# Altium PCB pcb sensor.PcbDoc
Units mm, origin at the board's own origin, x right, y up, seen from the top; angles counter-clockwise.
Board outline 89.99 x 89.99 mm, 2 copper layers (Top Layer, Bottom Layer); 119 components, 66 nets, 291 pads, 24 vias.
Unrouted connection lines stored in the file: 17.
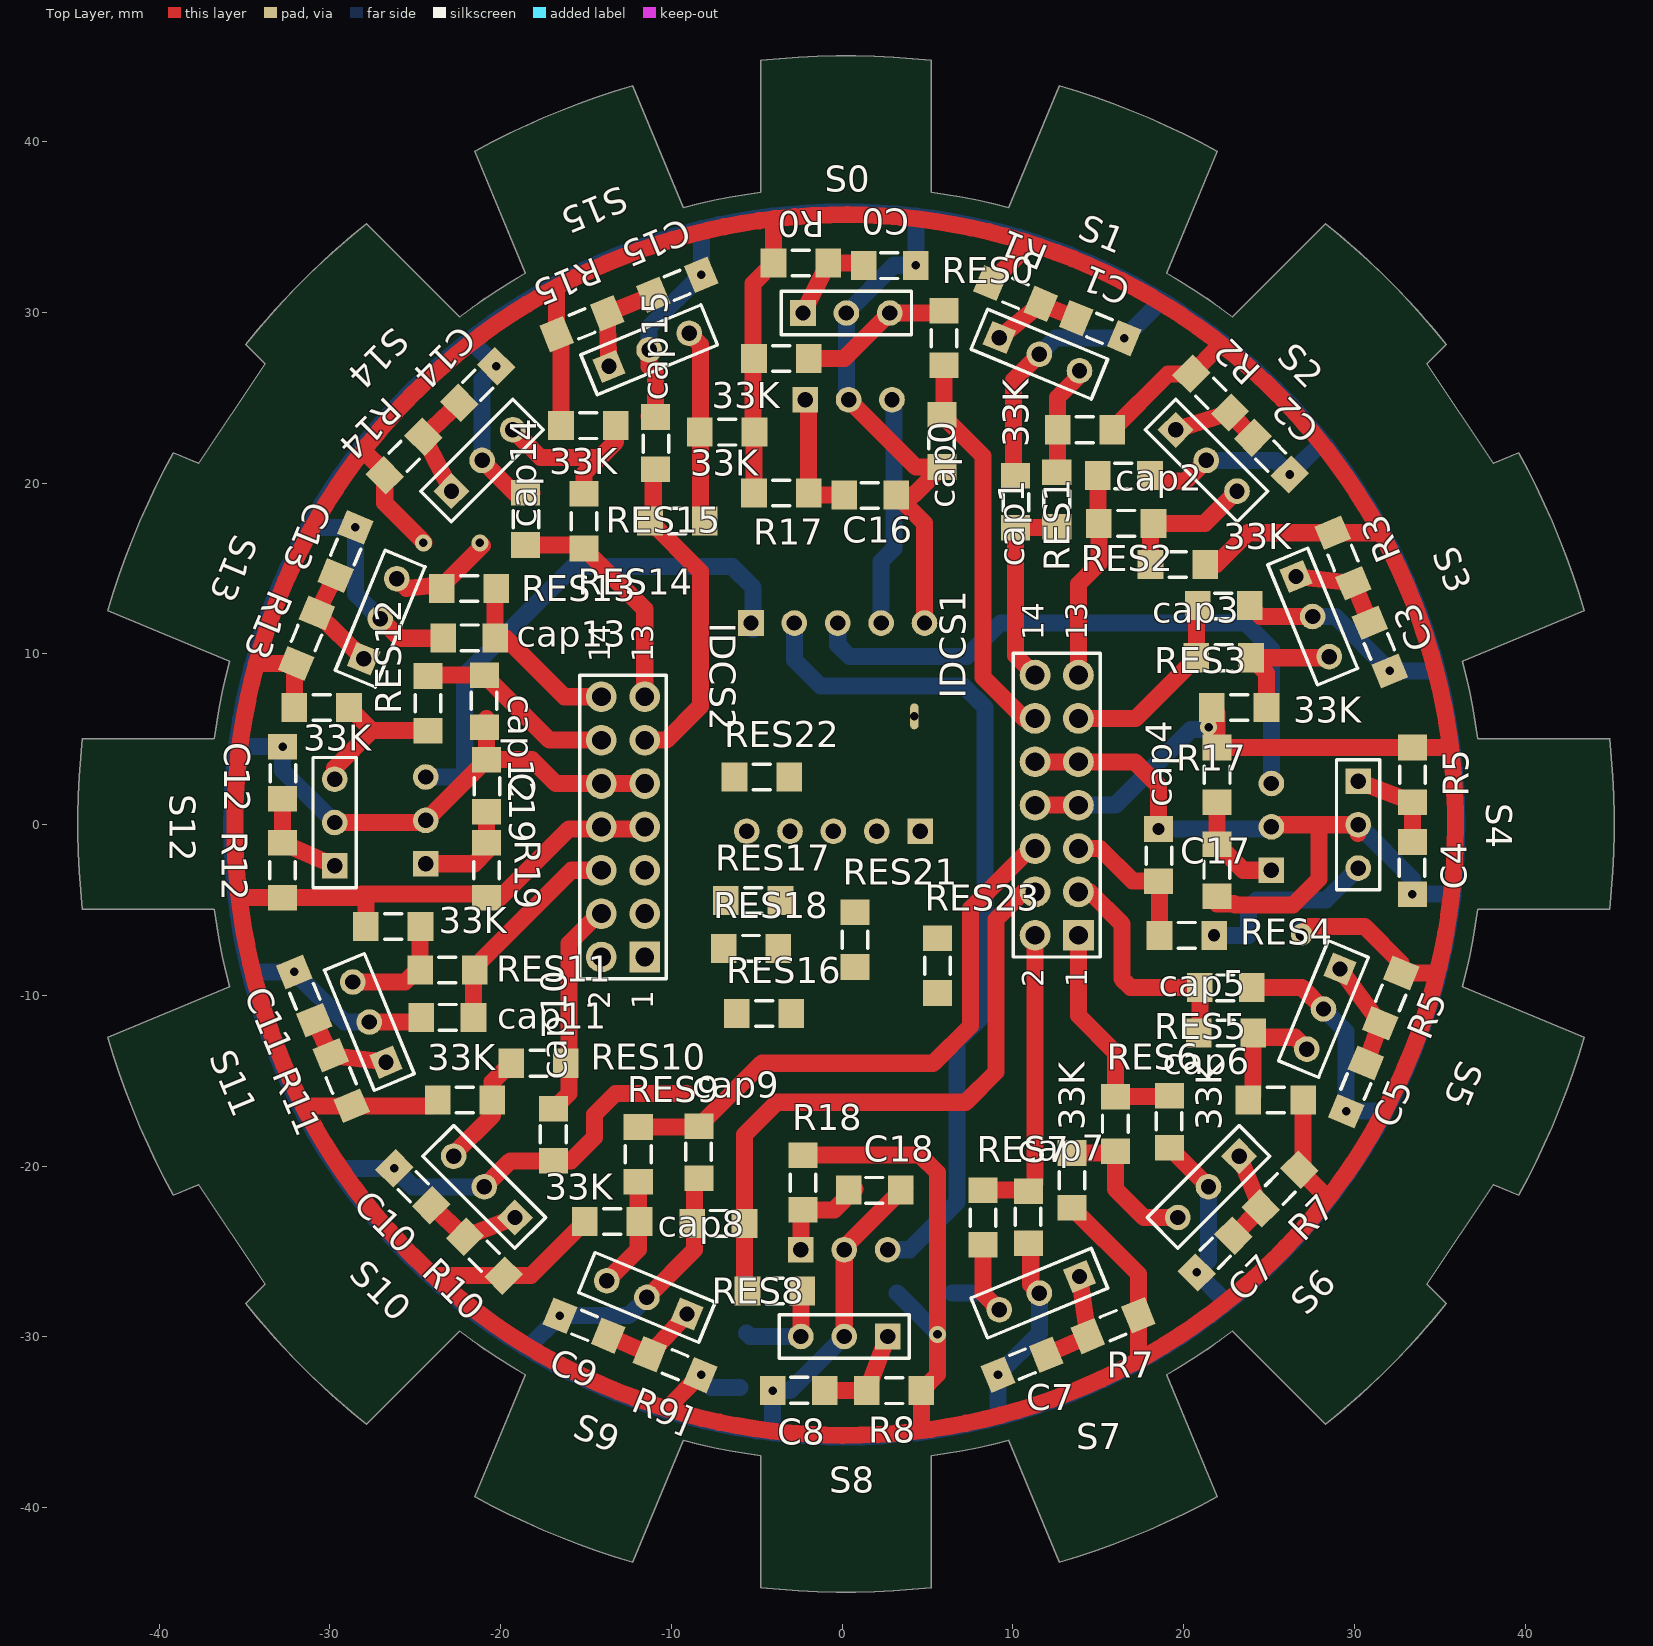
[diagram p0: Top Layer view]
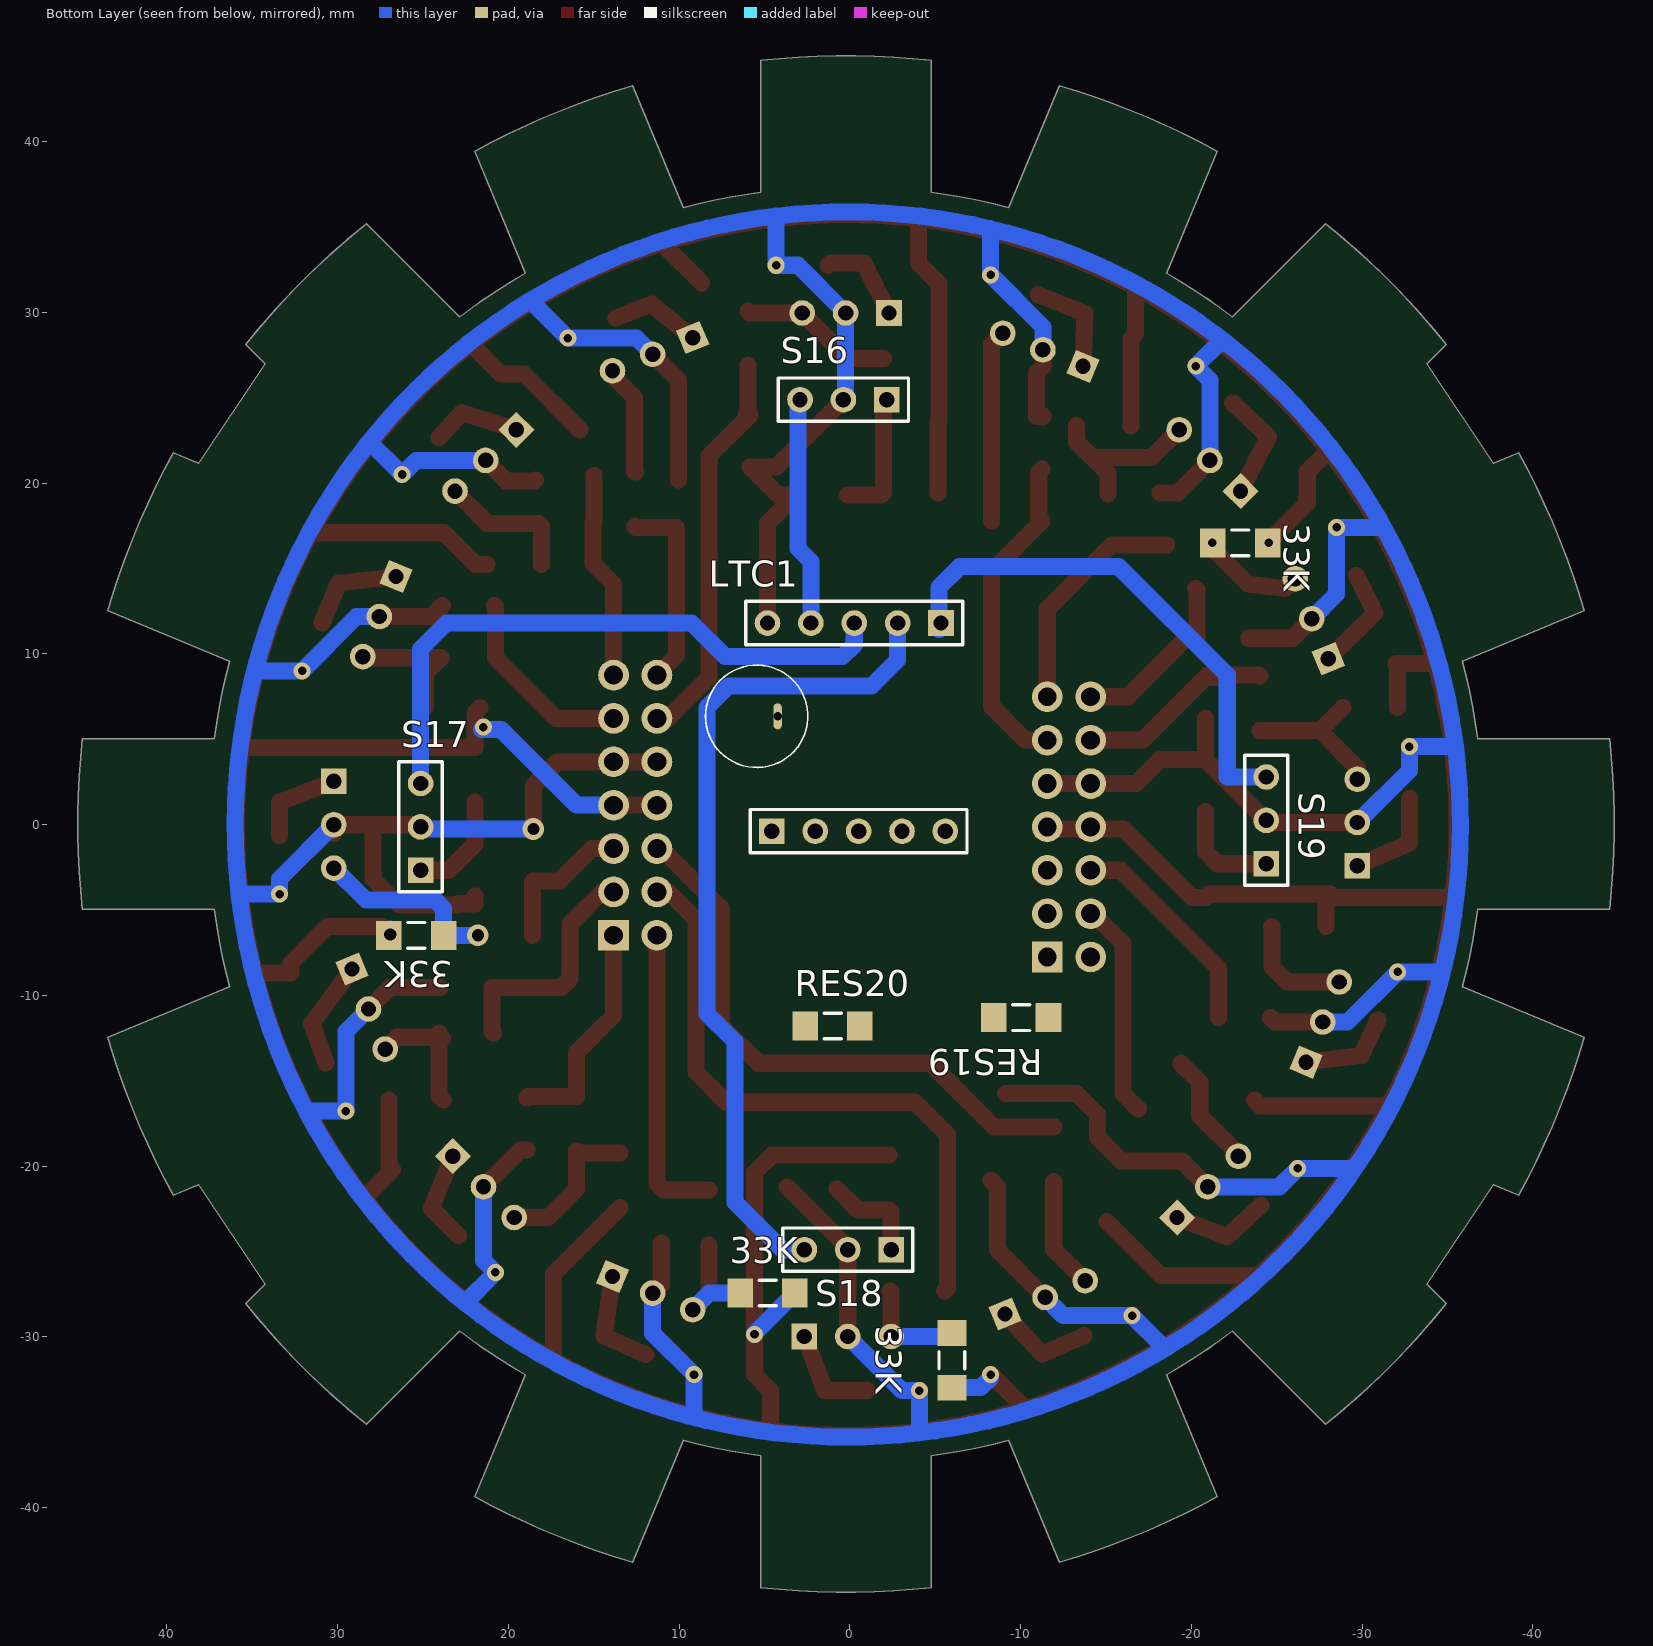
[diagram p1: Bottom Layer view, seen from below]
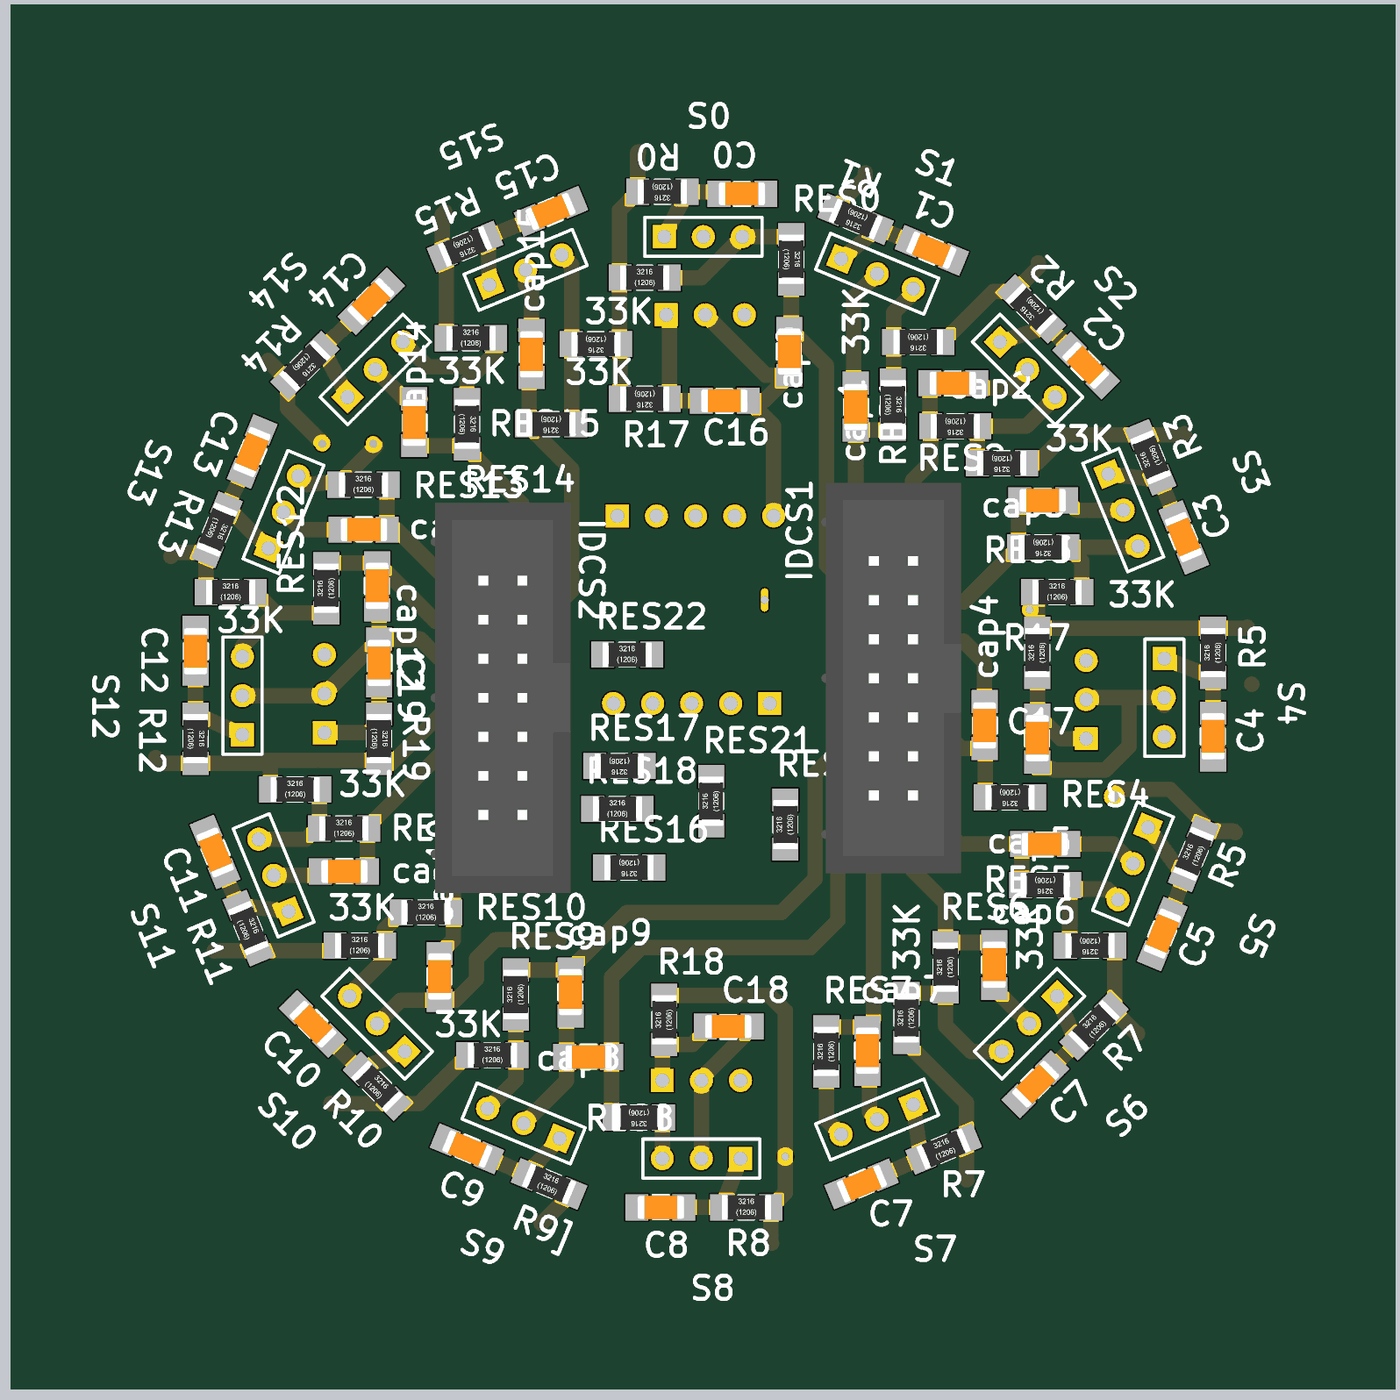
[diagram p2: 3D render of the assembled board from above, using the file's embedded part models]
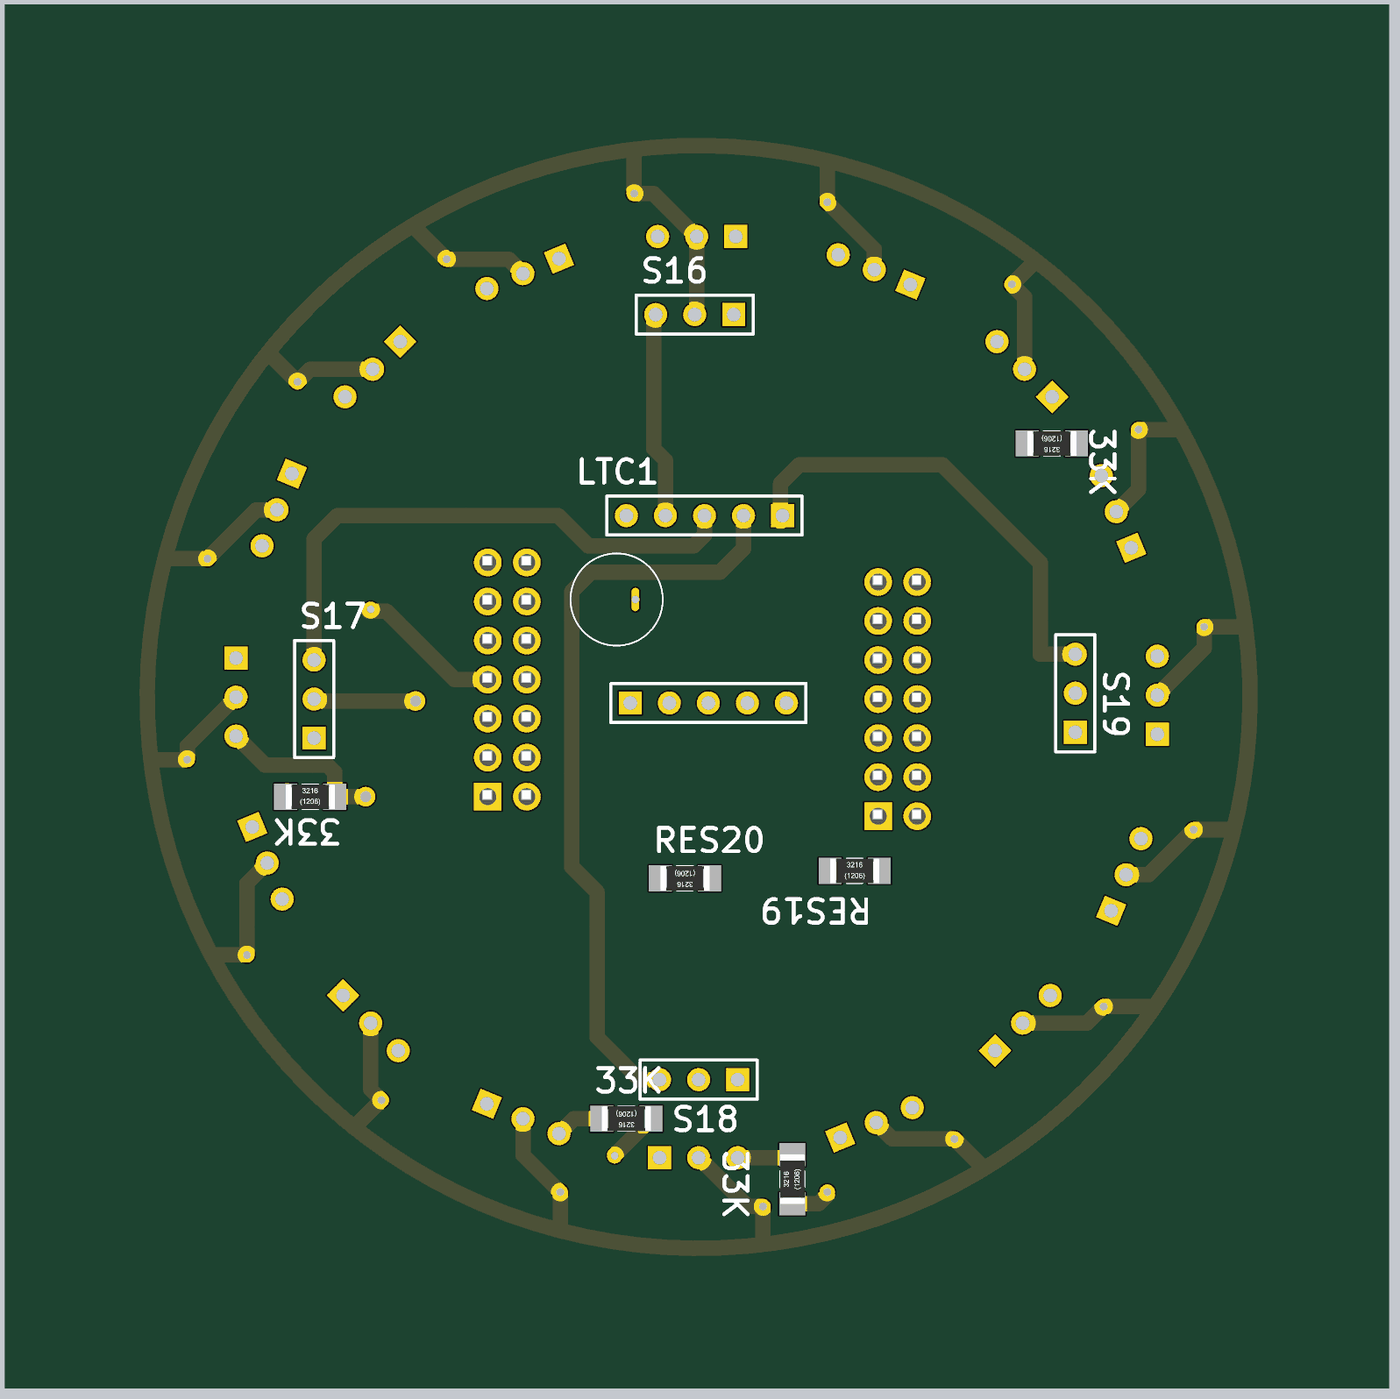
[diagram p3: 3D render of the assembled board from below, using the file's embedded part models]

## Layer stack, top to bottom
Top Solder: solder mask 0.0102, Solder Resist, Dk 3.5
Top Layer: signal copper 0.0356
Dielectric 1: dielectric 0.32, FR-4, Dk 4.8
Bottom Layer: signal copper 0.0356
Bottom Solder: solder mask 0.0102, Solder Resist, Dk 3.5

## Board outline
-34.928,-28.045 ccw(c0.23,0.042) -27.857,-35.116 -22.397,-29.656 ccw(c0.23,0.042) -18.549,-32.228 -21.504,-39.362 ccw(c0.23,0.042) -12.265,-43.189 -9.31,-36.055 ccw(c0.23,0.042) -4.77,-36.958 -4.77,-44.679 ccw(c0.23,0.042) 5.23,-44.679 5.23,-36.958 ccw(c0.23,0.042) 9.77,-36.055 12.725,-43.189 ccw(c0.23,0.042) 21.964,-39.362 19.009,-32.228 ccw(c0.23,0.042) 22.857,-29.656 28.317,-35.116 ccw(c0.23,0.042) 35.388,-28.045 34.254,-26.911 38.152,-21.078 39.634,-21.692 ccw(c0.23,0.042) 43.461,-12.453 36.327,-9.498 ccw(c0.23,0.042) 37.23,-4.958 44.951,-4.958 ccw(c0.23,0.042) 44.951,5.042 37.23,5.042 ccw(c0.23,0.042) 36.327,9.582 43.461,12.537 ccw(c0.23,0.042) 39.634,21.776 38.152,21.162 34.254,26.995 35.388,28.129 ccw(c0.23,0.042) 28.317,35.2 22.857,29.74 ccw(c0.23,0.042) 19.009,32.312 21.964,39.446 ccw(c0.23,0.042) 12.725,43.273 9.77,36.139 ccw(c0.23,0.042) 5.23,37.042 5.23,44.763 ccw(c0.23,0.042) -4.77,44.763 -4.77,37.042 ccw(c0.23,0.042) -9.31,36.139 -12.265,43.273 ccw(c0.23,0.042) -21.504,39.446 -18.549,32.312 ccw(c0.23,0.042) -22.397,29.74 -27.857,35.2 ccw(c0.23,0.042) -34.928,28.129 -33.794,26.995 -37.692,21.162 -39.174,21.776 ccw(c0.23,0.042) -43.001,12.537 -35.867,9.582 ccw(c0.23,0.042) -36.77,5.042 -44.491,5.042 ccw(c0.23,0.042) -44.491,-4.958 -36.77,-4.958 ccw(c0.23,0.042) -35.867,-9.498 -43.001,-12.453 ccw(c0.23,0.042) -39.174,-21.692 -37.692,-21.078 -33.794,-26.911

## Design rules (kind name [scope] priority, off if disabled: settings)
Clearance [All] p1: gap=0.5 ignorepadtopadclearanceinfootprint=FALSE
PolygonConnect [All] p1: connectstyle=Relief reliefconductorwidth=0.254 reliefentries=4 polygonreliefangle="90 Angle" airgapwidth=0.254
RoutingVias [All] p1: holewidth=0.711 width=1.27 viastyle="Through Hole" minholewidth=0.711 minwidth=1.27 maxholewidth=0.711 maxwidth=1.27
SolderMaskExpansion [All] p1: expansion=0.102
Width [All] p1: maxlimit=2 minlimit=0.5 preferedwidth=1
30 further rules are at their usual default settings.

## Classes and differential pairs
component class "sesnor schematic": 33K C0 C1 C2 C3 C4 C5 C7 C8 C9 C10 C11 C12 C13 C14 C15 C17 C18 C19 cap0 cap1 cap2 cap3 cap4 cap5 cap6 cap7 cap8 cap9 cap10 cap11 cap12 cap13 cap14 cap15 IDCS1 IDCS2 R0 R1 R2 R3 R5 R7 R8 R9] R10 R11 R12 R13 R14 R15 R17 R18 R19 RES0 RES1 RES2 RES3 RES4 RES5 RES6 RES7 RES8 RES9 RES10 RES11 RES12 RES13 RES14 RES15 RES18 RES20 RES21 RES22 RES23 S0 S1 S2 S3 S4 S5 S6 S7 S8 S9 S10 S11 S12 S13 S14 S15 S16 S17 S18 S19

## Components (designator, comment, footprint, x,y, rotation, side; value= is the part's Value field where it differs from the comment)
33K "SMD" "Resistor SMD 1206" -6.731,22.987 r180 top
33K "SMD" "Resistor SMD 1206" -14.859,23.368 r0 top
33K "SMD" "Resistor SMD 1206" -13.462,-23.241 r0 top
33K "SMD" "Resistor SMD 1206" 25.4,-6.477 r180 bottom
33K "SMD" "Resistor SMD 1206" -22.86,16.51 r0 bottom
33K "SMD" "Resistor SMD 1206" -5.969,-31.369 r90 bottom
33K "SMD" "Resistor SMD 1206" 23.259,6.858 r0 top
33K "SMD" "Resistor SMD 1206" 19.667,15.24 r180 top
33K "SMD" "Resistor SMD 1206" 4.826,-27.432 r0 bottom
33K "SMD" "Resistor SMD 1206" -30.48,6.858 r0 top
33K "SMD" "Resistor SMD 1206" -26.289,-5.969 r0 top
33K "SMD" "Resistor SMD 1206" 13.462,-20.828 r90 top
33K "SMD" "Resistor SMD 1206" 14.224,23.132 r180 top
33K "SMD" "Resistor SMD 1206" -22.086,-16.129 r0 top
33K "SMD" "Resistor SMD 1206" 25.4,-16.129 r180 top
33K "SMD" "Resistor SMD 1206" -3.556,27.305 r0 top
C0 "smd" "Cap SMD" 2.794,32.766 r180 top
C1 "smd" "Cap SMD" 15.113,29.083 r157.5 top
C2 "smd" "Cap SMD" 25.146,21.59 r135 top
C3 "smd" "Cap SMD" 31.496,10.414 r112.5 top
C4 "smd" "Cap SMD" 33.401,-2.54 r90 top
C5 "smd" "Cap SMD" 30.099,-15.367 r67.5 top
C7 "smd" "Cap SMD" 10.541,-31.623 r22.5 top
C7 "smd" "Cap SMD" 21.844,-25.146 r45 top
C8 "smd" "Cap SMD" -2.54,-33.147 r0 top
C9 "smd" "Cap SMD" -15.113,-29.337 r337.5 top
C10 "smd" "Cap SMD" -25.146,-21.209 r315 top
C11 "smd" "Cap SMD" -31.496,-10.033 r292.5 top
C12 "smd" "Cap SMD" -32.766,3.048 r270 top
C13 "smd" "Cap SMD" -29.083,16.002 r247.5 top
C14 "smd" "Cap SMD" -21.336,25.781 r225 top
C15 "smd" "Cap SMD" -9.652,31.623 r202.5 top
C16 "smd" "Cap SMD" 1.651,19.305 r180 top
C17 "smd" "Cap SMD" 21.971,-2.666 r90 top
C18 "smd" "Cap SMD" 1.905,-21.387 r180 top
C19 "smd" "Cap SMD" -20.828,2.286 r270 top
cap0 "smd" "Cap SMD" 5.842,22.479 r90 top
cap1 "smd" "Cap SMD" 10.16,18.923 r270 top
cap2 "smd" "Cap SMD" 16.51,20.447 r180 top
cap3 "smd" "Cap SMD" 22.352,12.827 r180 top
cap4 "smd" "Cap SMD" 18.542,-1.778 r270 top
cap5 "smd" "Cap SMD" 22.479,-9.525 r180 top
cap6 "smd" "Cap SMD" 19.177,-17.399 r90 top
cap7 "smd" "Cap SMD" 10.922,-22.987 r90 top
cap8 "smd" "Cap SMD" -7.239,-23.368 r0 top
cap9 "smd" "Cap SMD" -8.382,-19.177 r90 top
cap10 "smd" "Cap SMD" -16.891,-18.16 r90 top
cap11 "smd" "Cap SMD" -23.114,-11.303 r0 top
cap12 "smd" "Cap SMD" -20.954,7.239 r90 top
cap13 "smd" "Cap SMD" -21.844,10.922 r0 top
cap14 "smd" "Cap SMD" -18.542,17.907 r270 top
cap15 "smd" "Cap SMD" -10.922,22.352 r270 top
IDCS1 "IDC 2X7" "IDC 2X7" 12.954,1.397 r90 top
IDCS2 "IDC 2X7" "IDC 2X7" -12.446,0.127 r90 top (schematic designator IDCS?)
LTC1 "LTC TAK" "LTC TAK" -1.651,6.35 r0 bottom
R0 "SMD" "Resistor SMD 1206" -2.413,32.893 r180 top
R1 "SMD" "Resistor SMD 1206" 10.16,31.115 r157.5 top
R2 "SMD" "Resistor SMD 1206" 21.59,25.273 r135 top
R3 "SMD" "Resistor SMD 1206" 29.337,15.621 r112.5 top
R5 "SMD" "Resistor SMD 1206" 32.131,-10.16 r67.5 top
R5 "SMD" "Resistor SMD 1206" 33.401,2.921 r90 top
R7 "SMD" "Resistor SMD 1206" 15.875,-29.337 r22.5 top
R7 "SMD" "Resistor SMD 1206" 25.654,-21.336 r45 top
R8 "SMD" "Resistor SMD 1206" 3.048,-33.147 r0 top
R9] "SMD" "Resistor SMD 1206" -9.779,-31.623 r337.5 top
R10 "SMD" "Resistor SMD 1206" -20.955,-25.273 r315 top
R11 "SMD" "Resistor SMD 1206" -29.337,-14.986 r292.5 top
R12 "SMD" "Resistor SMD 1206" -32.766,-2.667 r270 top
R13 "SMD" "Resistor SMD 1206" -31.369,10.922 r247.5 top
R14 "SMD" "Resistor SMD 1206" -25.654,21.59 r225 top
R15 "SMD" "Resistor SMD 1206" -15.24,29.337 r202.5 top
R17 "SMD" "Resistor SMD 1206" 21.971,2.921 r90 top
R17 "SMD" "Resistor SMD 1206" -3.556,19.431 r180 top
R18 "SMD" "Resistor SMD 1206" -2.286,-20.955 r90 top
R19 "SMD" "Resistor SMD 1206" -20.828,-2.667 r270 top
RES0 "SMD" "Resistor SMD 1206" 5.969,28.499 r270 top
RES1 "SMD" "Resistor SMD 1206" 12.573,19.05 r270 top
RES2 "SMD" "Resistor SMD 1206" 16.637,17.653 r180 top
RES3 "SMD" "Resistor SMD 1206" 22.352,9.779 r180 top
RES4 "SMD" "Resistor SMD 1206" 20.193,-6.477 r180 top
RES5 "SMD" "Resistor SMD 1206" 22.479,-12.192 r180 top
RES6 "SMD" "Resistor SMD 1206" 16.002,-17.526 r90 top
RES7 "SMD" "Resistor SMD 1206" 8.255,-23.005 r90 top
RES8 "SMD" "Resistor SMD 1206" -3.937,-27.305 r180 top
RES9 "SMD" "Resistor SMD 1206" -11.938,-19.304 r90 top
RES10 "SMD" "Resistor SMD 1206" -17.78,-13.97 r0 top
RES11 "SMD" "Resistor SMD 1206" -23.114,-8.509 r0 top
RES12 "SMD" "Resistor SMD 1206" -24.257,7.112 r90 top
RES13 "SMD" "Resistor SMD 1206" -21.844,13.843 r0 top
RES14 "SMD" "Resistor SMD 1206" -15.113,17.78 r270 top
RES15 "SMD" "Resistor SMD 1206" -9.652,17.78 r180 top
RES16 "SMD" "Resistor SMD 1206" -4.572,-11.049 r180 top
RES17 "SMD" "Resistor SMD 1206" -5.207,-4.445 r180 top
RES18 "SMD" "Resistor SMD 1206" -5.334,-7.239 r0 top
RES19 "SMD" "Resistor SMD 1206" -10.033,-11.303 r180 bottom
RES20 "SMD" "Resistor SMD 1206" 1.016,-11.787 r0 bottom
RES21 "SMD" "Resistor SMD 1206" 0.762,-6.731 r90 top
RES22 "SMD" "Resistor SMD 1206" -4.7,2.794 r0 top
RES23 "SMD" "Resistor SMD 1206" 5.588,-8.255 r90 top
S0 "Header 3" HDR1X3 -2.286,29.972 r0 top
S1 "Header 3" HDR1X3 9.21,28.531 r337.5 top
S2 "Header 3" HDR1X3 19.54,23.132 r315 top
S3 "Header 3" HDR1X3 26.587,14.539 r292.5 top
S4 "Header 3" HDR1X3 30.226,2.54 r270 top
S5 "Header 3" HDR1X3 29.166,-8.448 r247.5 top
S6 "Header 3" HDR1X3 23.259,-19.413 r225 top
S7 "Header 3" HDR1X3 13.904,-26.46 r202.5 top
S8 "Header 3" HDR1X3 2.667,-29.972 r180 top
S9 "Header 3" HDR1X3 -9.083,-28.658 r157.5 top
S10 "Header 3" HDR1X3 -19.159,-23.005 r135 top
S11 "Header 3" HDR1X3 -26.714,-13.904 r112.5 top
S12 "Header 3" HDR1X3 -29.718,-2.413 r90 top
S13 "Header 3" HDR1X3 -28.023,9.718 r67.5 top
S14 "Header 3" HDR1X3 -22.878,19.54 r45 top
S15 "Header 3" HDR1X3 -13.65,26.841 r22.5 top
S16 "Header 3" HDR1X3 -2.159,24.892 r0 bottom
S17 "Header 3" HDR1X3 25.146,-2.667 r90 bottom
S18 "Header 3" HDR1X3 -2.413,-24.892 r0 bottom
S19 "Header 3" HDR1X3 -24.384,-2.286 r90 bottom

## Footprints (in the part's own frame and the unit in brackets; to place one, negate y for a bottom-side part, rotate by r counter-clockwise, add the part's x,y. Pads: shape width x height; smd on the part's side, far side on the other; paste and mask are expansions set on the pad)
"Cap SMD" [mm]
  rect 1.5x1.7 smd: 1(-1.525,0) 2(1.525,0)
  silkscreen extent -0.47,-0.72 0.53,0.78, body extent -1.49,-0.76 1.55,0.76, height 0.75
HDR1X3 [mm] "Connector; Header; 3 Position"
  rect 1.5x1.5 hole 0.9: 1(0,0)
  round 1.5 hole 0.9: 2(2.54,0) 3(5.08,0)
  silkscreen extent -1.27,-1.27 6.35,1.27
"IDC 2X7" [mm]
  rect 1.8x1.8 hole 1.1: 1(-7.874,-0.889)
  round 1.8 hole 1.1: 2(-7.874,1.651) 3(-5.334,-0.889) 4(-5.334,1.651) 5(-2.794,-0.889) 6(-2.794,1.651) 7(-0.254,-0.889) 8(-0.254,1.651) 9(2.286,-0.889) 10(2.286,1.651) 11(4.826,-0.889) 12(4.826,1.651) 13(7.366,-0.889) 14(7.366,1.651)
  silkscreen extent -9.14,-2.16 8.64,2.92, body extent -12.83,-4.06 12.55,5.04, height 9.3
"LTC TAK" [mm]
  rect 1.5x1.5 hole 0.9: 1(6.223,6.731) 6(-3.683,-5.461)
  round 1.5 hole 0.9: 2(3.683,6.731) 3(1.143,6.731) 4(-1.397,6.731) 5(-3.937,6.731) 7(-1.143,-5.461) 8(1.397,-5.461) 9(3.937,-5.461) 10(6.477,-5.461)
  oval 0.5x1.524 hole 0.5: 2(5.889,0)
  silkscreen extent -5.21,-6.73 10.11,8
"Resistor SMD 1206" [mm]
  rect 1.5x1.7 smd: 1(-1.6,0) 2(1.6,0)
  silkscreen extent -0.5,-0.75 0.5,0.75, body extent -1.6,-0.8 1.6,0.8, height 0.55

## Part data
33K 33K 33K 33K 33K 33K 33K 33K 33K 33K 33K 33K 33K 33K 33K 33K R0 R1 R2 R3 R5 R5 R7 R7 R8 R9] R10 R11 R12 R13 R14 R15 R17 R17 R18 R19 RES0 RES1 RES2 RES3 RES4 RES5 RES6 RES7 RES8 RES9 RES10 RES11 RES12 RES13 RES14 RES15 RES16 RES17 RES18 RES19 RES20 RES21 RES22 RES23: library part "Res SMD"
C0 C1 C2 C3 C4 C5 C7 C7 C8 C9 C10 C11 C12 C13 C14 C15 C16 C17 C18 C19 cap0 cap1 cap2 cap3 cap4 cap5 cap6 cap7 cap8 cap9 cap10 cap11 cap12 cap13 cap14 cap15: library part "Cap SMD"
S0 S1 S2 S3 S4 S5 S6 S7 S8 S9 S10 S11 S12 S13 S14 S15 S16 S17 S18 S19: "Header, 3-Pin", LatestRevisionDate=17-Jul-2002, LatestRevisionNote="Re-released for DXP Platform.", Publisher="Altium Limited"

## Via types
v1: diameter 1, hole 0.5, Top Layer to Bottom Layer, 21 vias
v2: diameter 1.27, hole 0.711, Top Layer to Bottom Layer, 3 vias

## Nets (pads, with @x,y where several pads share a name; then routed paths per layer and width w, separated by ;. In a path a pad name is that pad's centre, name@x,y a point inside that pad or via, vN(x,y) a via of type N, cw(c..) or ccw(c..) an arc to the next point about the centre after c; other vN are vias at no path point)
CR1: C0.2 R0.1 S0.1 | length 5.4
  Top Layer w1: S0.1 R0.1 1.142,32.893 C0.2
CR2: C1.2 R1.1 S1.1 | length 5.4
  Top Layer w1: S1.1 R1.1 C1.2
CR3: C2.2 R2.1 S2.1 | length 5.3
  Top Layer w1: S2.1 R2.1 C2.2
CR4: C3.2 R3.1 S3.1 | length 5.9
  Top Layer w1: S3.1 R3.1 C3.2
CR5: C4.2 R5.1@33.401,1.321 S4.1 | length 5.4
  Top Layer w1: S4.1 33.401,1.321 C4.2@33.401,-0.635
CR6: C5.2 R5.1@31.519,-11.638 S5.1 | length 6.4
  Top Layer w1: S5.1 31.519,-11.638 C5.2
CR7: C7.2@22.922,-24.068 R7.1@24.523,-22.467 S6.1 | length 5.6
  Top Layer w1: C7.2@22.922,-24.068 24.523,-22.467 S6.1
CR8: C7.2@11.95,-31.039 R7.1@14.397,-29.949 S7.1 | length 6.2
  Top Layer w1: C7.2@11.95,-31.039 14.397,-29.949 S7.1
CR9: C8.2 R8.1 S8.1 | length 5.9
  Top Layer w1: C8.2 R8.1 S8.1
CR10: C9.2 R9].1 S9.1 | length 5.9
  Top Layer w1: C9.2 R9].1 S9.1
CR11: C10.2 R10.1 S10.1 | length 5.9
  Top Layer w1: C10.2 R10.1 S10.1
CR12: C11.2 R11.1 S11.1 | length 5.5
  Top Layer w1: C11.2 R11.1 S11.1
CR13: C12.2 R12.1 S12.1 | length 5.9
  Top Layer w1: C12.2 R12.1 S12.1
CR14: C13.2 R13.1 S13.1 | length 6.3
  Top Layer w1: C13.2 R13.1 S13.1
CR15: C14.2 R14.1 S14.1 | length 6.5
  Top Layer w1: S14.1 R14.1 C14.2
CR16: C15.2 R15.1 S15.1 | length 6
  Top Layer w1: S15.1 R15.1 C15.2
CR17: C16.2 R17.1@-1.956,19.431 S16.1 | length 7.7
  Top Layer w1: S16.1 -2.21,24.841 -1.956,24.587 -1.956,19.431 -1.83,19.305 C16.2
CR18: C17.2 R17.1@21.971,1.321 S17.1 | length 6.3
  Top Layer w1: R17.1@21.971,1.321 C17.2 23.497,-2.667 S17.1
CR19: C18.2 R18.1 S18.1 | length 5.9
  Top Layer w1: S18.1 -2.413,-22.682 R18.1 -0.458,-22.555 C18.2@0.761,-21.336
CR20: C19.2 R19.1 S19.1 | length 6.2
  Top Layer w1: S19.1 -21.539,-2.286 -20.828,-1.575 R19.1 C19.2
GND: C0.1 C1.1 C2.1 C3.1 C4.1 C5.1 C7.1 C8.1 C9.1 C10.1 C11.1 C12.1 C13.1 C14.1 C15.1 C16.1 C17.1 C18.1 C19.1 cap0.1 cap1.1 cap2.1 cap3.1 cap4.1 cap5.1 cap6.1 cap7.1 cap8.1 cap9.1 cap10.1 cap11.1 cap12.1 cap13.1 cap14.1 cap15.1 IDCS1.9 IDCS1.10 IDCS2.9 IDCS2.10 LTC1.10 RES16.1 RES17.2 RES18.2 RES19.1 S0.2 S1.2 S2.2 S3.2 S4.2 S5.2 S6.2 S7.2 S8.2 S9.2 S10.2 S11.2 S12.2 S13.2 S14.2 S15.2 S16.2 S17.2 S18.2 S19.2 | length 513
  Top Layer w1: S12.2 -24.511,0.127 S19.2 ; S11.2 -24.893,-11.557 cap11.1 ; S13.2 -25.908,10.922 cap13.1 ; S19.2 C19.1 ; S14.2 -19.178,19.432 cap14.1 cap14.1@-18.161,19.432 ; S10.2 -19.431,-19.685 cap10.1 -15.875,-19.685 -14.497,-18.307 -14.497,-16.979 -13.266,-15.748 -9.117,-15.748 ; cap12.1@-20.827,6.223 -20.828,6.222 C19.1 ; IDCS2.9 IDCS2.10 -16.764,2.413 -18.162,3.811 C19.1 ; S9.2 -8.637,-24.893 -8.637,-21.211 cap9.1@-8.254,-20.828 ; S15.2 -11.303,26.84 -10.922,26.459 -10.922,23.923 -11.303,23.923 cap15.1@-11.257,23.877 ; S8.2 S18.2 0.127,-24.766 C18.1@3.684,-21.209 ; S16.2@0.254,25.019 S16.2 4.319,20.954 cap0.1 4.193,19.305 C16.1 4.826,17.655 LTC1.10 ; cap1.1@10.032,20.193 10.032,26.034 S1.2 ; cap7.1@11.049,-24.512 11.049,-26.924 S7.2 ; IDCS1.10 IDCS1.9 17.145,3.683 18.542,2.286 v2(18.542,-0.253) ; cap2.1@18.416,20.193 18.48,20.13 20.13,20.13 ; cap6.1@18.923,-19.051 19.305,-19.051 S6.2 ; 20.193,20.193 S2.2 ; C17.1 21.971,-4.627 22.957,-4.627 23.029,-4.699 26.416,-4.699 27.94,-3.175 27.94,0 ; cap3.1 24.512,12.192 S3.2@27.052,12.192 ; cap5.1 26.924,-9.525 S5.2 ; S17.2 25.273,0 27.94,0 ; S4.2@30.226,-0.501 S4.2 27.94,0
  Bottom Layer w1: -35.462,4.576 -35.459,4.573 v1(-32.766,4.573) -32.766,3.175 S12.2 ; -34.656,-8.791 -34.488,-8.624 v1(-32.08,-8.624) -29.147,-11.557 S11.2 ; -31.285,17.353 -31.227,17.411 v1(-28.499,17.411) -28.499,13.513 S13.2 ; -29.503,-20.22 -29.414,-20.131 v1(-26.224,-20.131) -25.146,-21.209 S10.2 ; -21.75,28.452 -21.75,28.351 v1(-20.258,26.859) -21.082,26.035 S14.2 ; -18.364,-30.734 -18.364,-30.596 v1(-16.522,-28.753) -12.497,-28.753 S9.2 ; S15.2 -11.303,29.147 v1(-8.243,32.207) -8.243,34.895 -8.249,34.901 ; -3.96,-35.632 -4.065,-35.527 v1(-4.065,-33.147) -3.048,-33.147 S8.2 ; S16.2 0.254,25.019 S0.2 3.048,32.766 v1(4.319,32.766) 4.319,35.637 4.328,35.646 ; 9.005,-34.749 9.132,-34.622 v1(9.132,-32.207) 11.557,-29.782 S7.2 ; S1.2 12.497,28.499 v1(16.522,28.499) 18.663,30.64 18.816,30.64 ; v2(18.542,-0.253) 25.02,-0.253 S17.2 ; S2.2 25.4,21.336 v1(26.224,20.512) 28.131,22.418 28.15,22.418 ; S6.2 21.463,-25.527 v1(20.766,-26.224) 22.533,-27.992 22.533,-28.008 ; S3.2 28.893,12.192 v1(32.08,9.005) 34.716,9.005 34.831,9.119 ; S5.2 29.515,-12.116 v1(29.515,-16.776) 31.795,-16.776 31.821,-16.802 ; S4.2 33.401,-3.175 v1(33.401,-4.065) 35.768,-4.065 35.773,-4.059 ; 35.94,2.174 ccw(c0.126,0.014) 35.941,2.159
L0: 33K.2@-1.956,27.305 RES0.1 S0.3 | length 9.1
  Top Layer w1: 33K.2@-1.956,27.305 0.127,27.305 S0.3 5.842,29.972 RES0.1
L1: 33K.2@12.624,23.132 RES1.1 S1.3 | length 6.2
  Top Layer w1: RES1.1 12.624,20.701 12.624,23.132 12.624,25.027 S1.3@13.904,26.307
L2: 33K.2@18.067,15.24 RES2.1 S2.3 | length 8.2
  Top Layer w1: 33K.2@18.067,15.24 18.067,17.483 RES2.1 21.245,17.653 S2.3
L3: 33K.2@24.859,6.858 RES3.1 S3.3 | length 7.9
  Top Layer w1: 33K.2@24.859,6.858 24.859,8.872 RES3.1 28.465,9.779 S3.3
L4: 33K.2@23.8,-6.477 RES4.1 S4.3 | length 11
  Bottom Layer w1: v2(21.793,-6.477) 23.8,-6.477 23.8,-4.902 24.285,-4.417 28.349,-4.417 S4.3
L5: 33K.2@23.8,-16.129 RES5.1 S5.3 | length 7.9
  Top Layer w1: 33K.2@23.8,-16.129 24.079,-15.85 RES5.1@24.079,-12.724 ; RES5.1@23.877,-12.522 RES5.1@24.079,-12.724 ; RES5.1 RES5.1@24.079,-12.724 ; S5.3 26.526,-12.446 24.357,-12.446 RES5.1@24.079,-12.724
L6: 33K.2@13.462,-19.228 RES6.1 S6.3 | length 9.1
  Top Layer w1: 33K.2@13.462,-19.228 15.9,-19.228 RES6.1 16.002,-21.336 17.671,-23.005 S6.3
L7: 33K.2@6.426,-27.432 RES7.1 S7.3 | length 7.4
  Top Layer w1: RES7.1 8.255,-27.449 S7.3
  Bottom Layer w1: 33K.2@6.426,-27.432 8.238,-27.432 S7.3
L8: 33K.2@-5.969,-29.769 RES8.1 S8.3 | length 6
  Top Layer w1: S8.3 -2.413,-27.381 RES8.1
  Bottom Layer w1: 33K.2@-5.588,-29.769 -5.385,-29.972 S8.3
L9: 33K.2@-11.862,-23.241 RES9.1 S9.3 | length 6.6
  Top Layer w1: S9.3 -11.938,-24.875 RES9.1
L10: 33K.2@-20.486,-16.129 RES10.1 S10.3 | length 6.7
  Top Layer w1: S10.3@-22.751,-19.304 -20.486,-17.039 -20.486,-16.129 -20.486,-15.076 RES10.1
L11: 33K.2@-24.689,-5.969 RES11.1 S11.3 | length 6.7
  Top Layer w1: S11.3 -25.594,-9.21 -24.714,-8.33 -24.714,-5.994 33K.2@-24.689,-5.969
L12: 33K.2@-28.88,6.858 RES12.1 S12.3 | length 9.2
  Top Layer w1: S12.3 -29.718,3.328 -27.534,5.512 ; 33K.2@-28.88,6.858 -27.534,5.512 ; RES12.1@-24.022,5.512 -27.534,5.512
L13: 33K.2@-21.26,16.51 RES13.1 S13.3 | length 6.2
  Top Layer w1: S13.3 -25.51,13.843 -23.471,14.079 -23.317,14.097 v1@-21.057,16.357
  other v1: -21.209,16.51
L14: 33K.2@-13.259,23.368 RES14.1 S14.3 | length 10.4
  Top Layer w1: S14.3 -17.668,21.514 -14.351,21.514 ; RES14.1 -15.113,20.574 -13.259,22.428 33K.2@-13.259,23.368
L15: 33K.2@-8.331,22.987 RES15.1 S15.3 | length 11.3
  Top Layer w1: S15.3 -8.301,28.129 RES15.1@-8.301,17.78
L16: LTC1.9 S16.3 | length 13.4
  Bottom Layer w1: LTC1.9 2.286,15.418 3.048,16.18 3.048,24.765 S16.3
L17: LTC1.8 S17.3 | length 36.3
  Bottom Layer w1: LTC1.8 -0.254,10.541 0.442,9.845 7.305,9.845 9.271,11.811 23.622,11.811 25.146,10.287 S17.3
L18: LTC1.7 S18.3 | length 49.4
  Bottom Layer w1: LTC1.7 -2.794,9.652 -1.27,8.128 7.112,8.128 8.382,6.858 8.382,-11.049 6.731,-12.7 6.731,-22.116 3.955,-24.892 S18.3
L19: LTC1.6 S19.3 | length 30.7
  Bottom Layer w1: S19.3 -22.098,2.794 -22.098,8.763 -15.748,15.113 -6.426,15.113 -5.207,13.894 LTC1.6@-5.207,11.43
NetLTC1_2: LTC1.2@2.032,-0.381 RES20.2
NetLTC1_3: LTC1.3 RES21.2
NetLTC1_4: LTC1.4 RES22.2
NetLTC1_5: LTC1.5 RES23.2
S0: cap0.2 IDCS1.12 RES0.2 | length 23.4
  Top Layer w1: cap0.2 8.255,21.591 8.255,8.636 10.668,6.223 IDCS1.12 ; RES0.2 5.969,24.13 cap0.2@6.096,24.003
S1: cap1.2 IDCS1.14 RES1.2 | length 11.5
  Top Layer w1: IDCS1.14 10.16,9.906 cap1.2 12.521,17.398 RES1.2
S2: cap2.2 IDCS1.13 RES2.2 | length 12.2
  Top Layer w1: IDCS1.13 13.843,14.097 15.037,15.291 RES2.2 14.985,17.705 cap2.2
S3: cap3.2 IDCS1.11 RES3.2 | length 11.5
  Top Layer w1: IDCS1.11 17.196,6.223 RES3.2 20.752,12.752 cap3.2
S4: cap4.2 IDCS1.5 RES4.2 | length 8.7
  Top Layer w1: IDCS1.5 15.113,-1.397 17.019,-3.303 cap4.2 18.593,-3.354 RES4.2
S5: cap5.2 IDCS1.3 RES5.2 | length 14
  Top Layer w1: IDCS1.3 14.517,-3.937 16.383,-5.803 16.383,-9.017 16.891,-9.525 cap5.2 20.954,-12.117 RES5.2
S6: cap6.2 IDCS1.1 RES6.2 | length 13.3
  Top Layer w1: IDCS1.1 13.843,-11.176 16.002,-13.335 RES6.2 18.848,-15.926 cap6.2@18.923,-16.001
S7: cap7.2 IDCS1.2 RES7.2 | length 17.7
  Top Layer w1: RES7.2 10.904,-21.405 11.303,-21.006 IDCS1.2
S8: cap8.2 IDCS1.4 RES8.2 | length 37.4
  Top Layer w1: RES8.2 -5.714,-27.128 cap8.2 -5.714,-18.16 -3.81,-16.256 7.239,-16.256 9.017,-14.478 9.017,-5.544 9.688,-4.873 9.688,-4.869 10.62,-3.937 IDCS1.4
S9: cap9.2 IDCS1.6 RES9.2 | length 34
  Top Layer w1: RES9.2 -8.434,-17.704 cap9.2 -4.7,-13.97 5.334,-13.97 7.517,-11.787 7.517,-4.923 8.188,-4.252 8.188,-4.248 11.039,-1.397 IDCS1.6
S10: cap10.2 IDCS2.4 RES10.2 | length 12.7
  Top Layer w1: cap10.2 -15.997,-15.741 -15.997,-6.96 -14.244,-5.207 IDCS2.4
S11: cap11.2 IDCS2.6 RES11.2 | length 12.8
  Top Layer w1: cap11.2 -21.589,-8.405 -21.514,-8.33 -15.851,-2.667 IDCS2.6
S12: cap12.2 IDCS2.12 RES12.2 | length 12.2
  Top Layer w1: RES12.2@-24.022,8.712 -23.97,8.764 cap12.2 cap12.2@-20.826,8.636 ; cap12.2@-21.464,8.636 cap12.2@-20.826,8.636 ; IDCS2.12 -17.143,4.953 cap12.2@-20.826,8.636
S13: cap13.2 IDCS2.14 RES13.2 | length 10.6
  Top Layer w1: RES13.2 -20.319,13.768 cap13.2 -19.685,10.922 -16.256,7.493 IDCS2.14
S14: cap14.2 IDCS2.13 RES14.2 | length 13.7
  Top Layer w1: cap14.2 -15.315,16.382 RES14.2 -11.557,12.624 IDCS2.13
S15: cap15.2 IDCS2.11 RES15.2 | length 19.3
  Top Layer w1: IDCS2.11 -10.287,4.953 -8.301,6.939 -8.301,14.829 RES15.2 -11.061,17.971 -11.061,20.631 cap15.2@-11.257,20.827
S16: IDCS2.5 RES18.1 RES20.1
S17: IDCS2.3 RES17.1 RES21.1
S18: IDCS2.1 RES16.2 RES22.1 | length 0.2
  Top Layer w1: IDCS2.1 IDCS2.1@-11.43,-7.874
S19: IDCS2.2 RES19.2 RES23.1
VCC: 33K.1 IDCS1.7 IDCS1.8 IDCS2.7 IDCS2.8 LTC1.1 R0.2 R1.2 R2.2 R3.2 R5.2 R7.2 R8.2 R9].2 R10.2 R11.2 R12.2 R13.2 R14.2 R15.2 R17.2 R18.2 R19.2 | length 418.4
  Top Layer w1: -35.356,-3.901 -34.99,-4.267 R12.2 -27.94,-4.267 ; -34.362,9.189 -34.107,9.444 R13.2 -32.08,9.345 33K.1@-32.08,6.858 ; -31.557,-16.471 -31.55,-16.464 R11.2 -24.022,-16.464 33K.1@-23.686,-16.129 ; -28.042,21.923 -26.785,20.667 R14.2 -26.785,18.835 v1@-24.491,16.541 ; 33K.1@-27.889,-5.969 -27.889,-4.318 -27.94,-4.267 ; -23.962,-26.383 -23.94,-26.404 R10.2 -18.225,-26.404 33K.1@-15.062,-23.241 ; -16.554,31.571 -16.718,31.407 R15.2 -16.459,28.466 33K.1@-16.459,23.368 ; IDCS2.7@-11.557,-0.254 -16.002,-0.254 -20.015,-4.267 R19.2 -21.031,-4.064 -28.143,-4.064 -27.94,-4.267 ; -10.297,-34.196 -10.262,-34.196 R9].2 ; R17.2@-5.156,19.431 -5.156,23.571 -5.207,23.622 -5.207,31.699 R0.2 -4.013,35.434 -3.958,35.489 ; R18.2 4.572,-19.355 5.588,-20.371 v1(5.588,-29.845) 5.588,-32.207 R8.2 4.648,-35.439 4.689,-35.48 ; R1.2 10.782,33.827 10.782,34.121 ; IDCS1.8 IDCS1.7 ; 33K.1@13.462,-22.428 17.353,-26.319 17.353,-28.725 17.353,-31.315 17.389,-31.351 ; 33K.1@15.824,23.132 19.096,26.404 R2.2 22.032,27.978 22.032,28.273 ; 33K.1@21.267,15.24 21.92,15.24 23.779,17.099 R3.2 31.465,17.099 31.528,17.163 ; 33K.1@21.659,6.858 21.971,6.546 21.971,4.521 33.401,4.521 35.569,4.521 35.63,4.582 ; v2(26.924,-6.426) 27.381,-5.969 30.607,-5.969 32.743,-8.105 32.743,-8.682 34.747,-8.682 34.839,-8.773 ; 33K.1@27,-16.129 27,-19.99 26.785,-20.205 28.427,-21.847 28.489,-21.847 ; 35.916,0.873 cw(c0.18,-0.018) 35.916,0.876
  Bottom Layer w1: v1@-8.243,-32.385 -7.659,-32.969 33K.1@-5.969,-32.969 ; 33K.1@3.226,-27.432 5.588,-29.794 v1(5.588,-29.845) ; IDCS1.7 16.002,1.143 20.447,5.588 v1@21.59,5.588 ; v2(26.924,-6.426) 33K.1@26.924,-6.096
  other v1: -8.243,-32.207 21.463,5.715 -24.523,16.51
pads on no net: LTC1.2@4.238,6.35

## Silkscreen, mask and mechanical layers (free items; w line width, h text height)
Mechanical 1:
  circle w0.013: c-33.249,-22.328 r1.5
  circle w0.013: c-33.249,22.412 r1.5
  circle w0.013: c33.709,22.412 r1.5
  circle w0.013: c33.709,-22.328 r1.5
  circle w0.013: c0.738,0.804 r30
  lines w0.013: -27.874,35.178 -22.414,29.718 ; -27.857,35.2 ccw(c0.23,0.042) -34.928,28.129 -33.794,26.995 -37.692,21.162 -39.174,21.776 ccw(c0.23,0.042) -43.001,12.537 -35.867,9.582 ccw(c0.23,0.042) -36.77,5.042 -44.491,5.042 ccw(c0.23,0.042) -44.491,-4.958 -36.77,-4.958 ccw(c0.23,0.042) -35.867,-9.498 -43.001,-12.453 ccw(c0.23,0.042) -39.174,-21.692 -37.692,-21.078 -33.794,-26.911 -34.928,-28.045 ccw(c0.23,0.042) -27.857,-35.116 -22.397,-29.656 ccw(c0.23,0.042) -18.549,-32.228 -21.504,-39.362 ccw(c0.23,0.042) -12.265,-43.189 -9.31,-36.055 ccw(c0.23,0.042) -4.77,-36.958 -4.77,-44.679 ccw(c0.23,0.042) 5.23,-44.679 5.23,-36.958 ccw(c0.23,0.042) 9.77,-36.055 12.725,-43.189 ccw(c0.23,0.042) 21.964,-39.362 19.009,-32.228 ccw(c0.23,0.042) 22.857,-29.656 28.317,-35.116 ccw(c0.23,0.042) 35.388,-28.045 34.254,-26.911 38.152,-21.078 39.634,-21.692 ccw(c0.23,0.042) 43.461,-12.453 36.327,-9.498 ccw(c0.23,0.042) 37.23,-4.958 44.951,-4.958 ccw(c0.23,0.042) 44.951,5.042 37.23,5.042 ccw(c0.23,0.042) 36.327,9.582 43.461,12.537 ccw(c0.23,0.042) 39.634,21.776 38.152,21.162 34.254,26.995 35.388,28.129 ccw(c0.23,0.042) 28.317,35.2 22.857,29.74 ccw(c0.23,0.042) 19.009,32.312 21.964,39.446 ccw(c0.23,0.042) 12.725,43.273 9.77,36.139 ccw(c0.23,0.042) 5.23,37.042 5.23,44.763 ccw(c0.23,0.042) -4.77,44.763 -4.77,37.042 ccw(c0.23,0.042) -9.31,36.139 -12.265,43.273 ccw(c0.23,0.042) -21.504,39.446 -18.549,32.312 ccw(c0.23,0.042) -22.397,29.74

## Text inside footprints (layer, text, board x,y; h text height)
IDCS1: Top Overlay "2" at 11.811,-9.525 h1.27 r90; Top Overlay "1" at 14.351,-9.525 h1.27 r90; Top Overlay "14" at 11.811,10.795 h1.27 r90; Top Overlay "13" at 14.351,10.795 h1.27 r90
IDCS2: Top Overlay "2" at -13.589,-10.795 h1.27 r90; Top Overlay "1" at -11.049,-10.795 h1.27 r90; Top Overlay "14" at -13.589,9.525 h1.27 r90; Top Overlay "13" at -11.049,9.525 h1.27 r90